# Altium PCB Rascal.PcbDoc (part 2 of 3)
Units mm, origin at the board's own origin, x right, y up, seen from the top; angles counter-clockwise.
Board outline 120.65 x 53.34 mm, 4 copper layers (Top Layer, Ground Plane, Power Plane, Bottom Layer); 125 components, 215 nets, 799 pads, 528 vias.
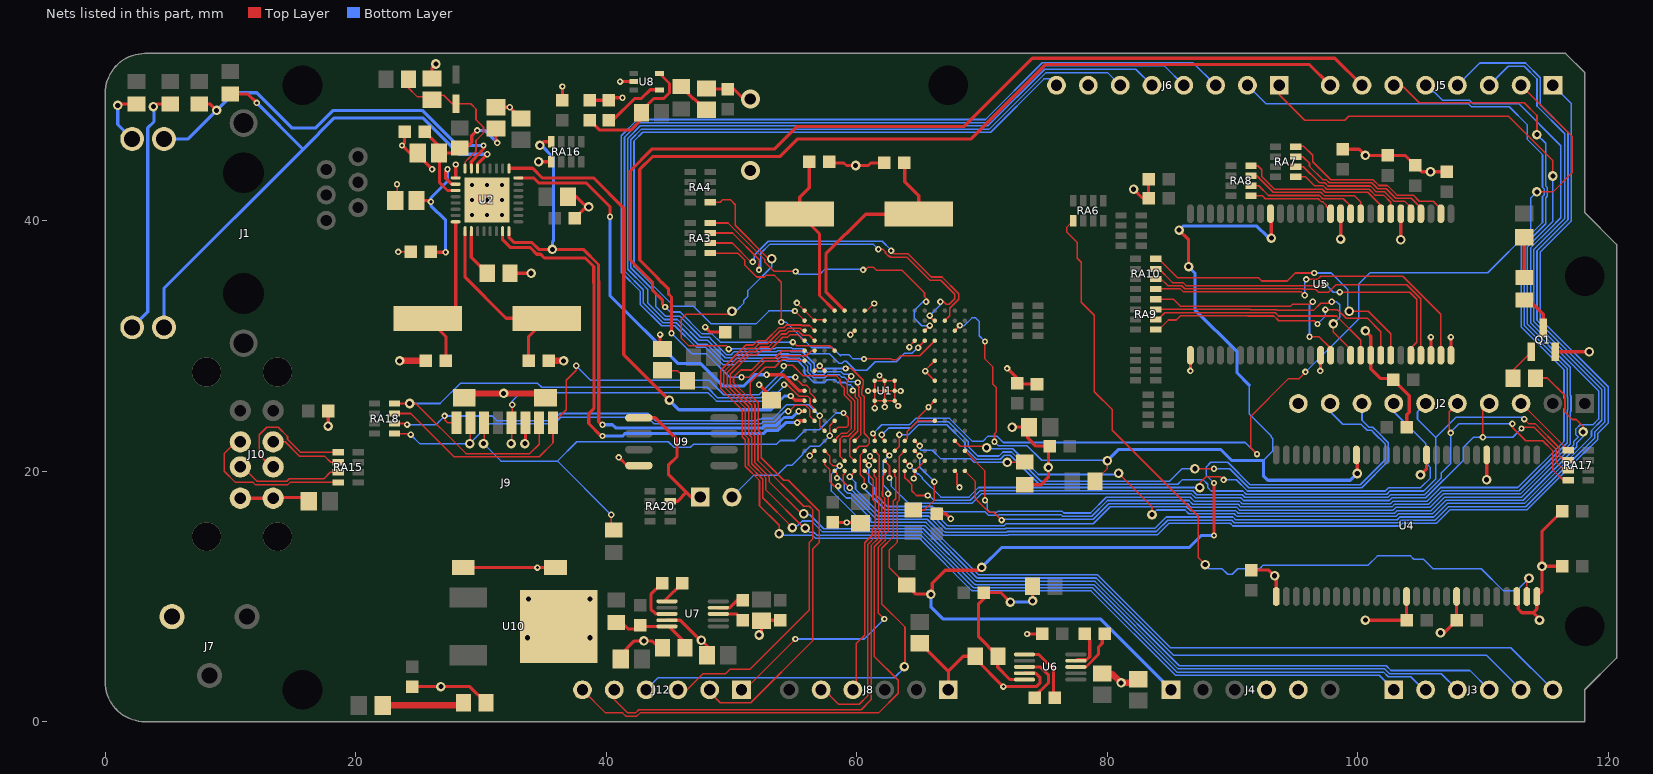
[diagram p4: the nets of this part, all layers, seen from the top]

## Via types
v1: diameter 0.508, hole 0.254, Top Layer to Bottom Layer, 343 vias
v2: diameter 0.762, hole 0.406, Top Layer to Bottom Layer, 170 vias
v3: diameter 0.66, hole 0.33, Top Layer to Bottom Layer, tented top, 9 vias
v4: diameter 2.3, hole 2.3, Top Layer to Bottom Layer, 4 vias
v5: diameter 1.524, hole 0.889, Top Layer to Bottom Layer, 2 vias

## Nets (pads, with @x,y where several pads share a name; then routed paths per layer and width w, separated by ;. In a path a pad name is that pad's centre, name@x,y a point inside that pad or via, vN(x,y) a via of type N, cw(c..) or ccw(c..) an arc to the next point about the centre after c; other vN are vias at no path point) (continued)
D15: RA6.5 U4.53 | length 62.4
  Top Layer w0.127: RA6.5@77.286,39.988 76.778,39.48 76.778,39.067 77.597,38.248 77.597,36.997 77.915,36.679 77.915,33.483 78.963,32.434 78.963,26.341 80.391,24.913 80.391,23.262 87.249,16.404 87.249,13.102 v2(87.821,12.53) ; U4.53@113.486,9.738 113.486,11.272 v2(113.665,11.451)
  Bottom Layer w0.127: v2(87.821,12.53) 88.138,12.213 89.16,12.213 89.605,11.769 89.973,11.769 90.418,12.213 92.163,12.213 92.45,12.5 100.831,12.5 101.56,13.229 104.202,13.229 104.456,12.975 105.239,12.975 106.001,12.213 109.855,12.213 111.633,10.435 112.649,10.435 v2(113.665,11.451)
D16: RA7.8 U5.2 | length 14.7
  Top Layer w0.127: RA7.8@95.05,45.92 95.685,45.92 96.393,45.212 96.393,44.704 97.829,43.268 101.217,43.268 101.686,42.799 102.362,42.799 103.124,42.037 104.413,42.037 104.9,41.55 106.024,41.55 106.628,40.946 U5.2@106.628,40.194
D17: RA7.7 U5.4 | length 12.7
  Top Layer w0.127: RA7.7@95.034,45.104 95.612,45.104 96.139,44.577 96.139,44.323 97.188,43.274 97.464,43.274 97.723,43.014 101.111,43.014 101.581,42.545 102.257,42.545 103.019,41.783 104.267,41.783 105.028,41.022 U5.4@105.028,40.194
D18: RA7.6 U5.5 | length 11.4
  Top Layer w0.127: RA7.6@95.034,44.304 95.65,44.304 96.934,43.02 97.359,43.02 97.618,42.76 101.006,42.76 101.476,42.291 102.152,42.291 102.914,41.529 103.759,41.529 104.228,41.06 U5.5@104.228,40.194
D19: RA7.5 U5.7 | length 9.7
  Top Layer w0.127: RA7.5@95.034,43.504 95.815,43.504 96.553,42.766 97.253,42.766 97.513,42.506 100.901,42.506 101.37,42.037 102.046,42.037 102.628,41.455 U5.7@102.628,40.194
D20: RA8.8 U5.8 | length 13
  Top Layer w0.127: RA8.8@91.478,44.38 92.018,44.38 92.329,44.069 92.329,43.529 93.346,42.512 97.148,42.512 97.408,42.252 100.796,42.252 101.828,41.22 U5.8@101.828,40.194
D21: RA8.7 U5.10 | length 10.9
  Top Layer w0.127: RA8.7@91.478,43.58 91.919,43.58 93.241,42.258 97.043,42.258 97.302,41.998 99.712,41.998 100.228,41.482 U5.10@100.228,40.194
D22: RA8.6 U5.11 | length 9.6
  Top Layer w0.127: RA8.6@91.478,42.78 92.094,42.78 92.87,42.004 96.938,42.004 97.197,41.744 98.84,41.744 99.428,41.157 U5.11@99.428,40.194
D23: RA8.5 U5.13 | length 7.5
  Top Layer w0.127: RA8.5@91.478,41.98 92.386,41.98 92.616,41.75 96.833,41.75 97.092,41.49 97.221,41.49 97.493,41.218 97.493,41.089 97.79,40.793 97.79,40.232 U5.13@97.828,40.194
D24: RA9.8 U5.42 | length 18.8
  Top Layer w0.127: RA9.8@83.858,33.712 85.287,33.712 85.838,33.161 91.506,33.161 91.52,33.147 94.615,33.147 94.79,33.322 96.187,33.322 v1(96.393,33.528) ; v1(96.139,30.734) 96.901,30.734 97.828,29.807 U5.42@97.828,28.894
  Bottom Layer w0.127: v1(96.139,30.734) 96.139,33.274 v1(96.393,33.528)
D25: RA9.7 U5.44 | length 20.4
  Top Layer w0.127: RA9.7@83.858,32.893 83.872,32.907 91.4,32.907 91.414,32.893 93.512,32.893 93.575,32.829 96.456,32.829 97.028,33.401 97.917,33.401 v1(97.917,33.528) ; v2(98.044,31.75) 98.044,31.115 99.441,29.718 99.441,28.907 U5.44@99.428,28.894
  Bottom Layer w0.127: v1(97.917,33.528) 98.298,33.528 98.552,33.274 98.552,32.258 v2(98.044,31.75)
D26: RA9.6 U5.45 | length 18.8
  Top Layer w0.127: RA9.6@84.074,32.152 84.575,32.653 91.295,32.653 91.309,32.639 93.407,32.639 93.661,32.385 98.298,32.385 100.228,30.455 U5.45@100.228,28.894
D27: RA9.5 U5.47 | length 22.4
  Top Layer w0.127: RA9.5@83.858,31.312 84.123,31.312 84.878,32.067 85.509,32.067 85.841,32.399 91.19,32.399 91.204,32.385 93.301,32.385 93.682,32.004 96.52,32.004 v1(96.774,31.75) ; v1(97.409,32.893) 98.379,32.893 99.077,32.194 100.766,32.194 101.828,31.132 U5.47@101.828,28.894
  Bottom Layer w0.127: v1(96.774,31.75) 97.409,32.385 v1(97.409,32.893)
D28: RA10.8 U5.48 | length 25.2
  Top Layer w0.127: RA10.8@83.858,36.944 84.087,36.944 85.598,35.433 92.075,35.433 92.329,35.179 94.361,35.179 94.996,35.814 v1(96.52,35.814) ; v2(99.314,32.766) 100.838,32.766 102.628,30.976 U5.48@102.628,28.894
  Bottom Layer w0.127: v1(96.52,35.814) 97.869,35.814 99.187,34.496 99.187,32.972 99.52,32.972 v2(99.314,32.766)
D29: RA10.7 U5.50 | length 26.8
  Top Layer w0.127: RA10.7@84.071,36.188 85.207,35.052 86.046,35.052 86.285,34.813 95.7,34.813 95.73,34.783 97.267,34.783 v1(97.409,34.925) ; v1(98.552,34.29) 104.14,34.29 104.7,33.73 104.7,30.28 104.228,29.808 U5.50@104.228,28.894
  Bottom Layer w0.127: v1(97.409,34.925) 98.044,34.29 v1(98.552,34.29)
D30: RA10.6 U5.51 | length 27.2
  Top Layer w0.127: RA10.6@83.858,35.344 84.29,35.344 84.836,34.798 85.941,34.798 86.18,34.559 95.594,34.559 95.625,34.529 96.625,34.529 96.864,34.29 97.663,34.29 98.25,34.877 103.912,34.877 105.028,33.761 U5.51@105.028,28.894
D31: RA10.5 U5.53 | length 29.2
  Top Layer w0.127: RA10.5@83.858,34.544 85.836,34.544 86.075,34.305 95.489,34.305 v1(95.758,34.036) ; v1(95.885,35.306) 96.774,35.306 97.028,35.56 103.588,35.56 106.628,32.52 U5.53@106.628,28.894
  Bottom Layer w0.127: v1(95.758,34.036) 95.758,35.179 v1(95.885,35.306)
DRXD: J8.4 U1.L17 | length 18.5
  Top Layer w0.127: J8.4@59.944,2.54 59.944,6.209 60.635,6.899 60.635,14.273 61.24,14.879 61.24,15.377 61.484,15.621 61.484,17.51 61.293,17.7 61.293,18.7 61.3,18.706 61.3,19.346 U1.L17@60.63,20.016
DTXD: J8.5 U1.K17 | length 22.9
  Top Layer w0.127: J8.5@57.277,2.667 58.544,1.4 60.2,1.4 60.889,2.088 60.889,14.167 61.494,14.773 61.494,15.272 61.738,15.516 61.738,17.615 61.547,17.805 61.547,18.595 61.554,18.601 61.554,19.451 61.392,19.613 61.392,19.978 U1.K17@61.43,20.016
ERX0: RA16.4 U1.U11 U2.16 | length 48.1
  Top Layer w0.254: U2.16@32.23,39.156 32.23,38.676 32.663,38.243 34.073,38.243 34.616,37.7 38.176,37.7 39.382,36.493 39.382,35.168 39.398,35.152 39.398,25.963 39.4,25.962 39.4,23.923 v1@39.661,23.661 ; v2(34.7,46) 35,46.3 RA16.4@35.6,46.3 ; v1@55.372,24.765 55.753,24.765 55.804,24.816 U1.U11@55.83,24.816
  Bottom Layer w0.254: v2@34.8,46 35.8,45 35.8,38.4 35.7,38.3 v2(35.7,37.7) ; v1(39.7,23.7) 40.5,23.7 40.747,23.453 52.474,23.453 52.652,23.631 53.539,23.631 54.186,24.278 54.864,24.278 v1(55.372,24.786)
ERX1: U1.U12 U2.15 | length 39.6
  Top Layer w0.254: U2.15@31.73,39.156 31.73,38.47 32.338,37.862 33.916,37.862 34.459,37.319 34.759,37.319 35.062,37.015 38.321,37.015 39.001,36.335 39.001,35.011 39.017,34.995 39.017,24.992 38.6,24.574 38.6,23.8 v1@39.65,22.75 ; v1@55.245,24.016 U1.U12@55.83,24.016
  Bottom Layer w0.254: v1(39.7,22.8) 41.3,22.8 41.508,23.008 52.568,23.008 52.81,23.25 53.697,23.25 54.323,23.876 v1(55.245,23.876)
ETX0: U1.U9 U2.24 | length 34.8
  Top Layer w0.254: U2.24@32.98,43.406 34.194,43.406 34.6,43 38.4,43 40.3,41.1 v1(40.3,40.3) ; v1(52.8,27.7) 54.118,27.7 55.402,26.416 U1.U9@55.83,26.416
  Bottom Layer w0.254: v1(40.3,40.3) 40.3,34 45.7,28.6 47.5,28.6 49.3,26.8 51,26.8 51.9,27.7 v1(52.8,27.7)
ETX1: U1.U10 U2.25 | length 39
  Top Layer w0.254: U2.25@32.23,44.156 32.255,44.181 34.119,44.181 34.9,43.4 39,43.4 41.4,41 41.4,29.3 v2(45.033,25.667) ; v1(54.73,26) 55.076,25.654 U1.U10@55.792,25.654
  Bottom Layer w0.254: v2(45.033,25.667) 45.8,24.9 53.126,24.9 54.226,26 v1(54.73,26)
GND: C3.2 C6.2 C7.2 C8.2 C9.2 C10.2 C11.2 C12.2 C13.1 C14.1 C15.2 C16.2 C17.2 C18.2 C19.2 C20.2 C21.2 C22.2 C23.2 C24.2 C25.2 C26.2 C27.2 C28.2 C29.2 C30.2 C31.2 C34.2 C36.2 C37.2 C40.2 C42.2 C43.2 C44.2 C46.2 C47.1 C48.1 C49.1 C50.1 C51.1 C52.1 C53.1 C54.1 C55.1 C56.1 C57.1 C58.1 C59.1 C60.1 C61.2 C62.2 C65.1 J2.10 J4.4 J4.5 J6.7 J7.2 J8.1 J9.6 J9.9 J9.10 J9.11 J9.12 J10.4 J10.8 Q1.2 R53.2 R62.2 R64.2 R68.1 R78.2 RA16.5 U1.B17 U1.D6 U1.D8 U1.D10 U1.D12 U1.E16 U1.F4 U1.F17 U1.G14 U1.H8 U1.H9 U1.H10 U1.J8 U1.J9 U1.J10 U1.K8 U1.K9 U1.K10 U1.K16 U1.L1 U1.M3 U1.R2 U1.R7 U1.T2 U1.T7 U1.T15 U1.U1 U2.1 U2.33 U4.6 U4.12 U4.28 U4.41 U4.46 U4.52 U4.54 U5.6 U5.12 U5.28 U5.41 U5.46 U5.52 U5.54 U6.9 U7.9 U8.2 U9.4 U10.2 | length 212.1
  Top Layer w0.127: C10.2@23.3,41.6 v1(23.3,42.9) ; v1(23.4,37.5) C11.2@24.4,37.5 ; C44.2@40.2,49.6 C44.2@40.4,49.8 ; v1@41.1,51.1 v1(41.106,51.094) ; v1@55.3,33.4 v1(55.216,33.43) U1.U1@55.83,32.816 U1.T2@56.63,32.016 56.714,32.1 57.346,32.1 U1.R2@57.43,32.016 ; v1@56.185,21.215 56.2,21.2 56.214,21.2 U1.T15@56.63,21.616 ; U1.T7@56.63,28.016 57,28.386 57,28.4 v1(57.046,28.4) U1.R7@57.43,28.016 ; v1@59.4,30.8 59.816,31.216 U1.M3@59.83,31.216 ; U1.L1@60.63,32.816 60.816,32.816 v1@61.4,33.4 ; v1(60.9,26.4) 60.916,26.416 U1.K9@61.43,26.416 ; v1(61.05,21.19) 61.056,21.19 U1.K16@61.43,20.816 ; U1.K8@61.4,27.2 U1.K8@61.43,27.2 ; v1(61.43,25.03) U1.K10@61.43,25.616 ; U1.K8@61.43,27.216 U1.K8@61.43,27.2 ; v1(61.816,27.63) U1.J8@62.23,27.216 U1.J8@62.23,27.2 ; v1@62.2,25.1 v1(62.23,25.13) U1.J10@62.23,25.616 ; v1(63.3,25.2) 63.03,25.47 U1.H10@63.03,25.616 ; v1(63.5,26.4) 63.484,26.416 U1.H9@63.03,26.416 ; U1.G14@63.83,22.416 64.042,22.628 64.042,23.168 ; 64.038,23.172 64.882,24.016 ; v1(64.2,29.9) 64.2,29.986 U1.F4@64.63,30.416 ; v1@64.6,19.3 64.63,19.33 U1.F17@64.63,20.016 U1.E16@65.43,20.816 ; U1.D12@66.23,24.016 64.882,24.016 ; U1.D10@66.23,25.616 64.882,24.268 64.882,24.016 ; U1.D8@66.23,27.216 65.546,27.9 65.4,27.9 65.4,27.986 U1.D6@66.23,28.816 ; U1.B17@67.83,20.016 68,19.846 68,18.9 v1(68.2,18.7) ; U1.K10@61.43,25.616 U1.J10@62.23,25.616 ; U1.K10@61.43,25.616 U1.K9@61.43,26.416 ; U1.K9@61.43,26.416 U1.J9@62.23,26.416 ; U1.K9@61.43,26.416 U1.K8@61.43,27.2 ; U1.K8@61.43,27.2 U1.J8@62.23,27.2 ; U1.J10@62.23,25.616 U1.J9@62.23,26.416 ; U1.J10@62.23,25.616 U1.H10@63.03,25.616 ; U1.J9@62.23,26.416 U1.H9@63.03,26.416 ; U1.J9@62.23,26.416 U1.J8@62.23,27.2 ; U1.J8@62.23,27.2 63.014,27.2 U1.H8@63.03,27.216 U1.H9@63.03,26.416 ; U1.H10@63.03,25.616 U1.H9@63.03,26.416
  Top Layer w0.254: J10.8@10.79,17.836 13.51,17.836 13.574,17.9 15.95,17.9 C14.1@16.25,17.6 ; v2@17.8,23.5 C13.1@17.8,24.8 ; C9.2@23.9,47.1 23.9,46.2 v1(23.7,46) 24.3,45.4 C8.2@24.95,45.4 ; C65.1@24.5,2.8 29.1,2.8 R78.2@30.4,1.5 ; C8.2@25.1,45.4 25,45.5 25,45.2 v1(26.1,44.1) ; C15.2@26.1,51.5 26.1,52.2 v2(26.4,52.5) ; U2.1@27.98,43.406 v1(27.98,44.48) ; J9.9@28.6,12.3 J9.10@35.95,12.3 ; C3.2@31.2,49.05 v1(32.3,49.05) C12.2@33.2,48.15 ; R53.2@32.3,35.8 v2(34,35.8) ; v2@33.5,22.3 33.55,22.35 J9.6@33.55,23.85 ; v2(34.6,44.7) RA16.5@35.6,44.7 ; C42.2@36.5,49.6 v1(36.5,50.7) ; C6.2@36.9,41.9 37.6,41.9 38.4,41.1 C7.2@37.5,40.2 C7.2@37.3,40.2 ; C43.2@38.7,49.6 C44.2@40.2,49.6 ; C44.2@40.4,49.8 v1(41.3,49.8) ; v1(41,21.1) 41.653,20.447 U9.4@42.6,20.447 ; v1(41.106,51.094) U8.2@42.197,51.094 ; C36.2@41.2,5.4 42.25,6.45 43.65,6.45 44.5,5.6 R64.2@44.5,5.5 ; v1(44.3,30.9) 44.3,29.95 C52.1@44.5,29.75 ; U7.9@44.85,8.1 45.9,8.1 v2@47.55,6.45 ; v2(47.6,6.5) 48.1,6 C37.2@48.1,5.3 ; v1(47.9,31.5) 48.3,31.1 C53.1@49.5,31.1 ; C55.1@48,50.5 49.3,50.5 50.2,50.5 v5@51,49.7 ; v1(52.2,26.9) 53.2,25.9 C56.1@53.2,25.6 ; v2@52.21,6.91 52.4,7.1 52.4,8.1 C46.2@53.9,8.1 ; C60.1@57.8,44.7 57.9,44.6 58.975,44.6 59.175,44.4 60.925,44.4 61.125,44.6 C59.1@62.2,44.6 ; C51.1@58.1,15.9 C50.1@60.3,15.9 ; C34.2@65.024,6.312 67.31,4.026 ; C49.1@66.4,16.6 67.1,16.6 v1(67.5,16.2) ; J8.1@67.31,2.54 67.31,4.026 ; v1(72,28.2) 72.8,27.4 C58.1@72.8,27 72.85,26.95 C57.1@74.388,26.95 ; v2@72.4,23.531 73.648,23.531 73.648,22.652 74.3,22 C47.1@75.4,22 75.3,21.9 75.3,19.5 74.712,18.912 R68.1@73.406,18.912 ; U6.9@73.388,3.864 74.274,3.864 74.638,3.5 74.638,3.1 74.338,2.8 v1(71.7,2.8) 69.458,5.042 R62.2@69.458,5.228 68.512,5.228 67.31,4.026 ; v1(73.6,7) C22.2@74.8,7 ; v2(82.1,42.5) 82.8,41.8 C27.2@83.3,41.8 C28.2@83.3,43.3 ; v1(86.628,28) U5.28@86.628,29.25 ; C20.2@91.5,12.1 92.9,12.1 93.486,11.514 U4.28@93.486,9.992 ; v1@97.028,28 U5.41@97.028,29.25 ; v2(98.628,38.528) U5.12@98.628,40.55 ; C26.2@98.8,45.7 100.1,45.7 v2(100.6,45.2) C25.2@102.4,45.2 103.8,45.2 C24.2@104.6,44.4 105.1,43.9 C23.2@106.9,43.9 ; v2(100.6,8.1) C19.2@103.9,8.1 ; v2(100.6,31.2) 101.028,30.772 U5.46@101.028,29.25 101.028,28.172 101.8,27.4 102.732,27.4 C29.2@102.832,27.3 104.1,26.032 104.1,24.7 103.9,24.5 C21.2@103.9,23.5 ; U5.6@103.428,40.55 v2(103.428,38.472) v2@103.5,38.4 ; C19.2@103.8,8.2 103.886,8.286 U4.41@103.886,9.992 ; v2(105,19.7) 105.486,20.186 U4.12@105.486,21.292 ; U5.52@105.828,29.25 v1(105.828,30.7) ; v2(106.6,7.1) 106.9,7.1 C18.2@107.9,8.1 107.886,8.114 U4.46@107.886,9.992 ; U5.54@107.428,29.25 v1(107.428,30.7) ; U4.6@110.286,21.292 v2(110.286,19.314) v2@110.3,19.3 ; U4.52@112.686,9.992 112.8,9.878 112.8,8.992 113.092,8.7 114,8.7 ; v2(114.5,8.1) 114.5,8.2 114,8.7 ; Q1.2@115.758,29.53 v2(118.47,29.53) ; C16.2@116.3,12.4 v2(114.7,12.4) ; C17.2@116.3,16.8 114.7,15.2 v2(114.7,12.4) ; 114,8.7 114.286,8.986 U4.54@114.286,9.992 114.7,10.406 v2(114.7,12.4)
  Top Layer w0.508: v2(23.5,28.8) C62.2@25.6,28.8 ; J9.11@28.65,26.2 J9.12@35.15,26.2 ; C61.2@35.4,28.8 v2(36.6,28.8) ; C31.2@79.5,3.8 80.4,3.8 v2(81.1,3.1) 82.236,3.1 C30.2@82.476,3.34
  other v1: 34.5,12.3 59.2,15.9 64.546,19.414 56.25,21.23 65.727,25.113 65.462,27.984 97,28 59.49,30.89 61.4,33.384
  other v2: 26.8,2.8 43,6.45 33.7,6.7 38.7,6.7 52.2,6.919 33.8,9.8 38.7,9.8 93.354,11.646 75.3,20.3 33.5,22.2 72.4,23.5 17.8,23.6 31.8,26.2 38.6,41.1 105.8,43.9 59.9,44.4
  other v3: 29.28,40.456 30.48,40.456 31.68,40.456 29.28,41.656 30.48,41.656 31.68,41.656 29.28,42.856 30.48,42.856 31.68,42.856
  other v4: 8.08,14.766 13.76,14.766 8.08,27.906 13.76,27.906
  other v5: 51.5,44 51.5,49.7
NetC3_1: C3.1 C8.1 C9.1 L1.2 U2.3 | length 13.4
  Top Layer w0.254: C9.1@25.5,47.1 26.7,45.9 C8.1@26.7,45.4 ; U2.3@27.98,42.406 27.336,42.406 27.33,42.4 26.7,43.03 C8.1@26.7,45.4 ; v1(29.7,47.2) 29.27,46.77 29.27,46.27 28.8,45.8 L1.2@28.3,45.8 27.9,45.4 C8.1@26.7,45.4 ; C3.1@31.2,47.35 31.2,46.3 v1(31.3,46.2)
  Bottom Layer w0.254: v1(29.7,47.2) 30.3,47.2 v1(31.3,46.2)
NetC10_1: C10.1 C11.1 U2.2 | length 11.8
  Top Layer w0.254: C10.1@24.85,41.6 25.9,41.6 v1(26,41.5) ; C11.1@26,37.5 26.025,37.475 v1(27.175,37.475) ; v1(27.33,44.1) 27.155,43.925 27.155,43.406 27.655,42.906 U2.2@27.98,42.906
  Bottom Layer w0.254: v1(27.175,37.475) 27.175,40.025 26,41.2 v1(26,41.5) 26,41.8 27.33,43.13 v1(27.33,44.1)
NetC15_1: C15.1 D1.1 R50.1 U2.32 | length 12.5
  Top Layer w0.127: R50.1@24.2,51.3 24.2,50.6 24.9,49.9 26,49.9 26.1,50 27.025,50 27.7,49.325 29.175,49.325 29.6,48.9 29.6,48.058 30.2,47.458 30.2,47 29.6,46.4 29.6,45.531 29.079,45.01 29.061,45.01 28.73,44.679 U2.32@28.73,44.156
NetC32_1: C32.1 U6.8 | length 4.4
  Top Layer w0.254: U6.8@73.388,4.364 74.651,4.364 75.311,3.704 75.311,3.122 C32.1@74.13,1.941
NetC32_2: C32.2 U6.6 | length 5.1
  Top Layer w0.254: U6.6@73.388,5.364 74.54,5.364 75.692,4.212 C32.2@75.692,1.9
NetC33_1: C33.1 U6.3 | length 4.1
  Top Layer w0.254: U6.3@77.488,4.364 78.298,4.364 79.3,5.366 79.3,5.95 79.6,6.25 C33.1@79.6,7.1
NetC33_2: C33.2 U6.4 | length 3.4
  Top Layer w0.254: U6.4@77.488,4.864 77.584,4.96 78.355,4.96 78.592,5.197 78.592,6.508 C33.2@78,7.1
NetC35_2: C35.2 R61.2 R62.1 U6.10 | length 14.8
  Top Layer w0.254: C35.2@70.142,10.308 71.501,10.308 v2(72.263,9.546) ; C35.2@70.485,10.181 69.723,9.419 69.723,6.763 R62.1@71.258,5.228 71.258,4.328 72.222,3.364 U6.10@73.388,3.364 ; R61.2@74.03,10.816 v2(74.03,9.648) 74.03,9.557 v2@74.041,9.546
  Bottom Layer w0.254: v2(72.263,9.546) 74.019,9.546 v2@74.03,9.557
NetC38_1: C38.1 U7.8 | length 3.9
  Top Layer w0.254: C38.1@44.467,11.059 43.567,10.159 43.567,8.983 43.95,8.6 U7.8@44.85,8.6
NetC38_2: C38.2 U7.6 | length 1.9
  Top Layer w0.254: U7.6@44.729,9.721 C38.2@46.067,11.059
NetC39_1: C39.1 U7.3 | length 2.2
  Top Layer w0.254: U7.3@48.95,8.6 50.4,8.6 C39.1@50.9,8.1
NetC39_2: C39.2 U7.4 | length 2.2
  Top Layer w0.254: U7.4@48.95,9.1 49.85,9.1 50.45,9.7 C39.2@50.9,9.7
NetC41_2: C41.2 R63.2 R64.1 U7.10 | length 7.1
  Top Layer w0.254: R63.2@40.8,7.9 41.25,7.9 41.75,7.4 42.6,7.4 C41.2@42.8,7.6 ; C41.2@42.7,7.7 C41.2@42.8,7.6 ; U7.10@44.85,7.6 C41.2@42.8,7.6 ; U7.10@45.025,7.575 46.3,6.3 R64.1@46.3,5.5
NetC43_1: C43.1 L5.1 U8.5 | length 10.2
  Top Layer w0.254: C43.1@38.7,48 39.478,47.222 41.947,47.222 42.8,48.075 L5.1@42.8,48.6 42.8,48.744 43.8,49.744 44.591,49.744 45.046,50.199 45.046,50.945 U8.5@44.247,51.744
NetC44_1: C44.1 U8.4 | length 5.1
  Top Layer w0.254: C44.1@40.2,48 40.526,48 42.27,49.744 42.8,49.744 43.5,50.444 U8.4@44.247,50.444
NetC52_2: C52.2 R66.2 | length 2.3
  Top Layer w0.127: C52.2@44.5,28 45.7,28 R66.2@46.5,27.2
NetC55_2: C55.2 R67.2 | length 2.6
  Top Layer w0.254: R67.2@46,50.7 47,49.7 47.05,49.7 47.8,48.95 C55.2@47.8,48.9
NetC59_2: C59.2 U1.N1 Y2.2 | length 18.5
  Top Layer w0.254: U1.N1@59.03,32.816 57.531,34.315 57.531,37.338 60.706,40.513 Y2.2@64.948,40.513 64.948,41.986 63.828,43.106 C59.2@63.828,44.7
NetC60_2: C60.2 U1.P1 Y2.1 | length 13.4
  Top Layer w0.254: C60.2@56.208,44.7 56.208,42.619 55.448,41.859 Y2.1@55.448,40.513 57.023,38.938 57.023,34.023 U1.P1@58.23,32.816
NetC61_1: C61.1 U2.9 Y1.2 | length 16.9
  Top Layer w0.254: U2.9@28.73,39.156 28.73,35.47 32,32.2 Y1.2@35.25,32.2 ; C61.1@33.8,28.8 33.8,30.75 Y1.2@35.25,32.2 ; Y1.2@36.55,32.2 Y1.2@35.25,32.2
NetC62_1: C62.1 U2.8 Y1.1 | length 12.1
  Top Layer w0.254: Y1.1@25.75,32.2 27.2,30.75 C62.1@27.2,28.8 ; Y1.1@27.05,32.2 27.98,33.13 U2.8@27.98,39.906
NetD2_2: D2.2 R78.1 | length 6.5
  Top Layer w0.508: D2.2@22.15,1.3 28.4,1.3 R78.1@28.6,1.5
NetD4_2: D4.2 R87.1 | length 3.2
  Top Layer w0.254: R87.1@113.284,35.444 D4.2@113.284,38.674
NetJ1_13: J1.13 R46.1 U2.30 | length 44.8
  Top Layer w0.254: R46.1@10,50.1 11.4,50.1 v1(12.1,49.4) ; U2.30@29.73,44.156 29.73,44.53 v1(30.5,45.3)
  Bottom Layer w0.254: J1.13@4.695,31.482 4.695,34.595 15.806,45.706 18.3,48.2 25.35,48.2 28.25,45.3 v1(30.5,45.3) ; v1(12.1,49.4) 15.794,45.706
NetJ1_14: J1.14 R43.1 | length 19.7
  Top Layer w0.254: v2@3.9,49.1 4.1,49.3 R43.1@5.2,49.3
  Bottom Layer w0.254: J1.14@2.155,31.482 3.4,32.727 3.4,47.4 3.9,47.9 v2@3.9,49.1
  other v2: 3.85,49.1
NetJ1_15: J1.15 R45.1 U2.31 | length 33.9
  Top Layer w0.254: J1.15@4.695,46.518 J1.15@4.813,46.4 ; R45.1@7.5,49.3 8.4,49.3 v2(8.9,48.8) ; U2.31@29.23,44.156 29.23,44.712 29.992,45.474 29.992,45.51 30.2,45.718 v1(30.2,46)
  Bottom Layer w0.254: J1.15@4.695,46.518 6.618,46.518 v2(8.9,48.8) 10.3,50.2 12.1,50.2 14.9,47.4 16.81,47.4 18.21,48.8 25.3,48.8 28.1,46 v1(30.2,46)
NetJ1_16: J1.16 R42.1 | length 4.7
  Top Layer w0.254: v2(1,49.2) 1.1,49.3 R42.1@2.5,49.3
  Bottom Layer w0.254: v2(1,49.2) 1,47.673 J1.16@2.155,46.518
NetJ2_3: J2.3 RA17.5 | length 6.1
  Top Layer w0.127: J2.3@112.38,25.4 113.06,25.4 116.611,21.849 RA17.5@116.983,21.849
NetJ2_5: J2.4 RA17.7 U1.J16 | length 65.2
  Top Layer w0.127: U1.J16@62.23,20.816 62.611,20.435 v1(62.611,19.452) v1@62.738,19.325 ; J2.4@109.84,25.4 109.985,25.255 v1(109.985,22.7) ; v1@113.157,23.516 114.046,23.516 115.824,21.738 115.824,20.722 116.459,20.087 116.783,20.087 RA17.7@116.802,20.068
  Top Layer w0.254: U1.J16@62.23,20.816 U1.J16@62.23,20.828
  Bottom Layer w0.127: v1(62.611,19.452) 62.738,19.325 62.738,18.817 64.123,17.432 66.158,17.432 66.17,17.42 69.171,17.42 69.933,18.182 86.717,18.182 87.034,17.865 90.66,17.865 90.871,17.653 102.508,17.653 102.719,17.865 105.43,17.865 108.418,20.853 108.418,21.882 109.236,22.7 112.36,22.7 v1(113.06,23.4)
NetJ2_7: J2.5 RA17.8 U1.G17 | length 64.7
  Top Layer w0.127: U1.G17@63.83,20.016 63.83,19.482 64.05,19.262 ; 64.065,19.262 64.325,19.001 ; 64.325,18.986 64.389,18.923 64.389,18.436 64.77,18.055 v1(65.659,18.055) ; v1(107.41,23.05) 107.3,23.16 107.3,24.75 J2.5@107.95,25.4 ; v1(112.335,23.775) 112.335,23.496 113.406,22.425 114.756,22.425 115.57,21.611 115.57,20.087 116.389,19.268 RA17.8@116.802,19.268
  Bottom Layer w0.127: v1@65.786,18.055 66.155,17.686 66.263,17.686 66.275,17.674 69.065,17.674 69.827,18.436 86.822,18.436 87.139,18.119 90.765,18.119 90.977,17.907 102.403,17.907 102.614,18.119 105.325,18.119 106.672,19.466 106.672,19.869 107.418,20.615 107.418,23.124 108.069,23.775 v1(112.335,23.775)
NetJ2_9: J2.6 RA17.6 U1.H15 | length 68.3
  Top Layer w0.127: U1.H15@63.03,21.626 U1.H15@63.03,21.616 63.403,21.989 v1(63.403,22.9) ; v1(113.284,24.151) 113.665,23.77 114.173,23.77 116.078,21.865 116.078,21.23 116.44,20.868 RA17.6@116.802,20.868
  Bottom Layer w0.127: v1@63.383,22.9 64.125,22.9 64.925,23.7 67.192,23.7 68.64,22.252 68.64,21.865 69.55,20.955 71.455,20.955 71.772,21.273 72.246,21.273 74.574,18.944 85.619,18.944 86,19.325 87.63,19.325 88.011,18.944 88.011,18.69 88.286,18.415 90.828,18.415 91.082,18.161 102.297,18.161 102.551,18.415 105.262,18.415 106.224,19.377 106.224,22.687 ; J2.6@105.41,25.4 104.76,24.75 104.76,24.151 106.224,22.687 ; v1(113.284,24.151) 113.135,24.3 107.838,24.3 106.224,22.687
NetJ2_11: J2.7 U1.G16 | length 52.2
  Top Layer w0.127: U1.G16@63.83,20.816 v1(64.23,20.416) ; v2(87.376,18.69) 87.376,19.05 87.884,19.558 89.027,19.558 v1(89.281,19.304)
  Bottom Layer w0.127: v1(64.23,20.416) 64.876,19.77 64.954,19.77 65.215,19.509 65.215,19.432 66.718,17.928 68.96,17.928 69.722,18.69 86.927,18.69 86.943,18.674 87.244,18.674 v2@87.376,18.542 ; v1(89.281,19.304) 90.298,19.304 91.187,18.415 102.192,18.415 102.446,18.669 105.008,18.669 105.791,19.452 105.791,20.29 105.418,20.663 105.418,22.202 102.87,24.75 J2.7@102.87,25.4
NetJ2_13: J2.8 U1.J14 | length 51.5
  Top Layer w0.127: v1(62,22.9) 62,22.646 U1.J14@62.23,22.416 ; v2(86.995,20.193) v1(88.519,20.193)
  Bottom Layer w0.127: v1(62,22.9) 62.544,23.444 64.31,23.444 64.82,23.954 67.297,23.954 68.894,22.357 68.894,21.97 69.655,21.209 71.35,21.209 71.667,21.526 72.351,21.526 74.679,19.198 84.963,19.198 85.958,20.193 v2(86.995,20.193) ; v1(88.519,20.193) 89.768,20.193 91.292,18.669 100.304,18.669 102.435,20.8 102.435,22.272 101.609,23.098 101.199,23.507 100.893,23.507 100.33,24.07 J2.8@100.33,25.4
NetJ2_15: J2.9 J4.1 R76.2 U1.G15 | length 91.2
  Top Layer w0.127: U1.G15@63.83,21.616 63.405,21.191 63.405,17.696 63.246,17.537 63.246,14.346 62.6,13.7 62.6,12.3 R76.2@64,10.9
  Top Layer w0.254: R76.2@64,10.9 64.719,10.181 v2@65.934,10.181 ; v2@66.019,10.16 66.019,11.049 67.056,12.086 v2@69.871,12.086 ; v2@69.744,12.086 v2(69.977,12.319) ; v1(88.519,14.859) v1(88.519,19.05)
  Bottom Layer w0.127: v1(88.519,19.05) 87.884,19.685 87.884,20.32 88.265,20.701 89.62,20.701 91.398,18.923 100.199,18.923 102.181,20.905 102.181,22.167 101.355,22.993 101.094,23.253 100.747,23.253 100.25,23.75 98.79,23.75 97.79,24.75 J2.9@97.79,25.4
  Bottom Layer w0.254: v2(65.913,10.16) 65.913,9.159 66.872,8.2 79.43,8.2 J4.1@85.09,2.54 ; v2(69.977,12.319) 71.558,13.9 86.544,13.9 87.503,14.859 v1(88.519,14.859)
NetJ3_0: J3.1 U1.T3 | length 78.2
  Top Layer w0.127: v2@53.963,15.201 53.8,15.363 53.8,15.669 52.237,17.232 52.237,19.246 51.1,20.382 51.1,22.496 50.858,22.737 50.858,24.886 49.14,26.605 49.14,28.057 51.128,30.046 51.169,30.046 51.195,30.072 51.735,30.072 52.079,30.416 52.738,30.416 53.784,31.462 53.791,31.455 54.159,31.455 54.366,31.662 55.582,31.662 55.621,31.623 56.223,31.623 U1.T3@56.63,31.216
  Bottom Layer w0.127: v2@53.8,14.865 56.47,14.865 56.697,14.638 65,14.638 69.164,10.474 69.218,10.474 69.257,10.435 78.704,10.435 85.435,3.704 101.706,3.704 J3.1@102.87,2.54
  other v2: 53.8,15
NetJ3_1: J3.2 U1.T4 | length 78.6
  Top Layer w0.127: v2@55.88,15.367 52.745,18.502 52.745,19.456 51.608,20.593 51.608,22.706 51.366,22.948 51.366,25.145 49.648,26.864 49.648,27.847 51.338,29.538 51.379,29.538 51.405,29.564 51.774,29.564 51.8,29.538 51.919,29.538 52.141,29.759 52.29,29.908 52.949,29.908 53.988,30.947 54.37,30.947 54.576,31.154 55.371,31.154 55.677,30.848 56.198,30.848 U1.T4@56.63,30.416
  Bottom Layer w0.127: v2(55.888,15.451) 56.22,15.119 56.575,15.119 56.802,14.892 65.106,14.892 69.27,10.728 69.323,10.728 69.362,10.689 78.809,10.689 85.54,3.958 102.046,3.958 102.427,3.577 104.227,3.577 105.264,2.54 J3.2@105.41,2.54
NetJ3_2: J3.3 U1.U3 | length 81.6
  Top Layer w0.127: v2(54.864,15.494) 52.491,17.867 52.491,19.351 51.354,20.487 51.354,22.601 51.112,22.842 51.112,25.039 49.394,26.758 49.394,27.952 51.233,29.792 51.274,29.792 51.3,29.818 51.84,29.818 51.887,29.864 52.185,30.162 52.844,30.162 53.883,31.201 54.264,31.201 54.471,31.408 55.476,31.408 55.668,31.216 U1.U3@55.83,31.216
  Bottom Layer w0.127: v2(54.864,15.494) 55.012,15.642 55.271,15.642 55.651,16.022 56.379,16.022 57.255,15.146 65.211,15.146 69.375,10.982 69.428,10.982 69.467,10.943 78.914,10.943 85.645,4.212 102.152,4.212 102.533,3.831 106.659,3.831 J3.3@107.95,2.54
NetJ3_3: J3.4 U1.U4 | length 81.8
  Top Layer w0.127: v2(55.763,16.601) 55.763,16.52 55.753,16.51 55.669,16.51 52.999,19.18 52.999,19.561 51.862,20.698 51.862,22.811 51.62,23.053 51.62,25.25 49.902,26.969 49.902,27.741 51.444,29.284 51.484,29.284 51.511,29.31 51.668,29.31 51.695,29.284 52.025,29.284 52.173,29.432 52.395,29.654 53.054,29.654 54.093,30.693 54.475,30.693 54.681,30.9 55.266,30.9 55.75,30.416 U1.U4@55.83,30.416
  Bottom Layer w0.127: v2(55.763,16.601) 55.854,16.51 56.25,16.51 57.36,15.4 65.316,15.4 69.48,11.236 69.533,11.236 69.572,11.197 79.02,11.197 85.751,4.466 102.257,4.466 102.638,4.085 108.945,4.085 J3.4@110.49,2.54
NetJ3_4: J3.5 U1.R15 | length 66.1
  Top Layer w0.127: U1.R15@57.43,21.616 57.434,21.616 57.828,21.223 57.828,20.687 58.094,20.42 v1(58.63,20.42)
  Bottom Layer w0.127: v1(58.63,20.42) 57.975,19.766 57.975,18.406 60.727,15.654 65.421,15.654 69.585,11.49 69.639,11.49 69.66,11.469 79.107,11.469 85.276,5.3 110.27,5.3 J3.5@113.03,2.54 J3.5@112.819,2.54
NetJ3_5: J3.6 U1.R16 | length 67.3
  Top Layer w0.127: U1.R16@57.43,20.816 57.43,20.537 57.835,20.132 57.835,19.175 58.21,18.8 v1(58.51,18.8)
  Bottom Layer w0.127: v1(58.51,18.8) 58.51,18.5 59.158,17.852 59.493,17.852 61.102,16.243 61.102,15.908 65.527,15.908 69.691,11.744 79.191,11.744 85.035,5.9 112.21,5.9 J3.6@115.57,2.54 J3.6@115.57,3.069
NetJ5_0: J5.1 U1.P17 | length 99.5
  Top Layer w0.127: U1.P17@58.23,20.016 58.42,19.826 v1(58.42,19.452)
  Bottom Layer w0.127: v1(58.42,19.452) 58.633,19.452 59.002,19.083 59.002,18.87 58.99,18.859 58.99,18.491 59.251,18.23 59.497,18.23 61.566,16.162 65.632,16.162 66.9,14.893 66.962,14.893 66.975,14.88 72.064,14.88 72.107,14.923 84.011,14.923 84.921,15.833 89.818,15.833 90.03,15.621 103.35,15.621 103.561,15.833 106.272,15.833 107.351,16.912 113.512,16.912 118.023,21.423 118.045,21.423 119.162,22.541 119.162,23.025 119.979,23.842 119.979,26.727 114.554,32.152 114.554,37.486 117.03,39.963 117.03,49.34 J5.1@115.57,50.8
NetJ5_1: J5.2 U1.K14 | length 82
  Top Layer w0.127: v1(61.3,23) 61.43,22.87 U1.K14@61.43,22.416 ; v1(91.948,21.357) 91.44,21.865 91.44,24.36 94.469,27.39 95.313,27.39 v1@95.829,27.906 ; J5.2@113.03,50.8 117.094,46.736 117.094,43.815 115.57,42.291 v2(114.3,42.291)
  Bottom Layer w0.127: v1(61.3,23) 62,23.7 64.207,23.7 64.715,24.208 67.402,24.208 69.237,22.373 70.058,22.373 70.481,22.796 71.177,22.796 71.685,22.288 91.017,22.288 v1(91.948,21.357) ; v1@95.829,27.906 100.076,32.152 100.076,34.946 100.965,35.835 110.378,35.835 113.792,39.249 113.792,41.783 v2(114.3,42.291)
  other v1: 95.81,27.925
NetJ5_2: J5.3 U1.M17 | length 103.1
  Top Layer w0.127: v1(59.436,19.558) 59.83,19.952 U1.M17@59.83,20.016
  Bottom Layer w0.127: v1(59.436,19.558) 59.9,19.094 59.9,18.546 61.776,16.67 65.842,16.67 67.111,15.401 67.172,15.401 67.186,15.388 71.854,15.388 71.897,15.431 83.801,15.431 84.71,16.341 90.029,16.341 90.24,16.129 103.139,16.129 103.351,16.341 106.061,16.341 107.141,17.42 113.301,17.42 118.654,22.773 118.654,23.235 119.471,24.052 119.471,26.516 114.046,31.942 114.046,37.696 116.522,40.173 116.522,46.926 114.3,49.149 114.3,51.308 113.284,52.324 112.014,52.324 J5.3@110.49,50.8
NetJ5_3: J5.4 U1.N17 | length 106.9
  Top Layer w0.127: U1.N17@59.03,20.016 59.03,19.808 58.928,19.706 58.928,19.159 v1@59.423,18.663
  Bottom Layer w0.127: v1@59.423,18.663 61.671,16.416 65.737,16.416 67.005,15.147 67.067,15.147 67.08,15.134 71.959,15.134 72.002,15.177 83.906,15.177 84.815,16.087 89.923,16.087 90.135,15.875 103.244,15.875 103.456,16.087 106.166,16.087 107.246,17.166 113.406,17.166 117.918,21.677 ; J5.4@107.95,50.8 109.728,52.578 113.389,52.578 114.554,51.413 114.554,49.254 116.776,47.032 116.776,40.068 114.3,37.591 114.3,32.047 119.725,26.622 119.725,23.947 118.908,23.13 118.908,22.646 117.939,21.677
  other v1: 59.435,18.675
NetJ5_4: J5.5 U1.L15 | length 106.1
  Top Layer w0.127: v1(60.6,18.8) 60.6,19.41 60.261,19.748 60.261,21.248 U1.L15@60.63,21.616
  Bottom Layer w0.127: v1(60.6,18.8) 60.6,18.6 62.276,16.924 65.947,16.924 67.216,15.655 67.277,15.655 67.291,15.642 71.749,15.642 71.907,15.8 78.879,15.8 80.229,17.15 86.312,17.15 86.613,16.849 90.239,16.849 90.451,16.637 102.929,16.637 103.14,16.849 105.851,16.849 106.93,17.928 113.091,17.928 117.221,22.058 117.221,22.351 117.59,22.72 117.411,22.898 117.411,23.372 117.746,23.707 118.767,23.707 119.217,24.157 119.217,26.411 113.792,31.836 113.792,37.811 115.376,39.395 115.376,39.397 116.205,40.226 116.205,45.995 ; J5.5@105.41,50.8 105.41,50.292 106.087,50.292 106.786,49.593 108.924,49.593 109.178,49.34 112.84,49.34 116.194,45.985
NetJ5_5: J5.6 U1.L16 | length 103
  Top Layer w0.127: U1.L16@60.63,20.816 60.63,20.798 60.96,20.468 v1(60.964,20.472) ; J5.6@102.87,50.8 103.505,50.8 104.902,49.403 113.284,49.403 114.3,48.387 v2(114.3,46.863)
  Bottom Layer w0.127: v1(60.964,20.472) 60.96,20.468 60.96,19.14 61.45,18.65 61.45,18.164 62.436,17.178 66.053,17.178 66.192,17.039 66.676,17.039 66.951,16.764 70.228,16.764 70.524,16.468 71.282,16.468 71.346,16.531 76.303,16.531 76.43,16.404 78.764,16.404 80.018,17.658 86.522,17.658 86.824,17.357 90.45,17.357 90.661,17.145 102.718,17.145 102.93,17.357 105.64,17.357 106.72,18.436 112.88,18.436 116.713,22.269 116.713,24.854 116.765,24.905 116.765,25.895 116.713,25.946 116.713,28.197 113.284,31.626 113.284,38.023 114.998,39.737 114.998,41.822 115.126,41.949 115.126,42.633 114.998,42.76 114.998,46.164 v2(114.3,46.863)
NetJ5_6: J5.7 U1.P5 | length 90
  Top Layer w0.127: v1(54.9,30.3) 55.2,30 57.846,30 U1.P5@58.23,29.616
  Top Layer w0.254: v1(44.7,33.1) 44.5,33.3 44.5,33.626 43.688,34.438 43.688,35.073 41.91,36.851 41.91,43.963 43.667,45.72 53.446,45.72 55.245,47.519 68.58,47.519 74.02,52.959 98.171,52.959 J5.7@100.33,50.8
  Bottom Layer w0.127: v1(44.7,33.1) 45.1,32.7 45.9,32.7 47.648,30.952 48.448,30.952 49.1,30.3 v1(54.9,30.3)
NetJ5_7: J5.8 U1.T5 | length 87.2
  Top Layer w0.127: v1(50.8,27.5) 51.4,27.5 52.666,28.765 53.554,28.765 53.988,29.2 55.96,29.2 56.376,29.616 U1.T5@56.63,29.616
  Top Layer w0.254: v1(45.212,31.009) 45.212,33.9 44.958,34.154 44.958,34.565 44.471,35.052 44.441,35.052 44.069,35.424 44.069,35.454 42.672,36.851 42.672,44.09 43.688,45.106 53.848,45.106 55.245,46.503 69.088,46.503 75.036,52.451 96.139,52.451 J5.8@97.79,50.8
  Bottom Layer w0.127: v1(45.212,31.009) 46.863,29.358 48.006,29.358 49.864,27.5 v1(50.8,27.5)
NetJ6_8: J6.1 U1.A17 | length 103.7
  Top Layer w0.127: U1.A17@68.63,20.016 69.469,19.177 69.469,17.801 70.549,16.722 70.929,16.722 v1(71.564,16.087) ; J6.1@93.726,50.8 93.726,50.038 95.754,48.01 98.96,48.01 99.273,48.323 112.031,48.323 115.57,44.785 v2(115.57,43.561)
  Bottom Layer w0.127: v1@71.498,16.15 78.87,16.15 80.123,17.404 86.417,17.404 86.718,17.103 90.344,17.103 90.556,16.891 102.823,16.891 103.035,17.103 105.746,17.103 106.825,18.182 112.986,18.182 116.967,22.163 116.967,24.749 117.019,24.8 117.019,26 116.967,26.052 116.967,28.302 113.538,31.731 113.538,37.918 115.57,39.95 v2(115.57,43.561)
NetJ6_9: J6.2 U1.A15 | length 106.1
  Top Layer w0.127: U1.A15@68.63,21.616 70.231,20.015 v1(70.231,17.674)
  Bottom Layer w0.127: v1(70.231,17.674) 70.421,17.484 70.421,16.929 70.629,16.722 71.177,16.722 71.241,16.785 76.408,16.785 76.535,16.658 78.659,16.658 79.913,17.912 86.628,17.912 86.929,17.611 90.555,17.611 90.766,17.399 102.613,17.399 102.825,17.611 105.535,17.611 106.615,18.69 112.775,18.69 116.459,22.374 116.459,24.959 116.511,25.01 116.511,25.79 116.459,25.841 116.459,28.092 113.03,31.521 113.03,38.128 114.745,39.843 114.745,41.927 114.871,42.054 114.871,42.528 114.745,42.655 114.745,45.272 113.538,46.479 113.538,47.625 112.078,49.085 109.072,49.085 108.818,49.34 92.647,49.34 J6.2@91.186,50.8
NetJ6_10: J6.3 U1.M16 | length 91.7
  Top Layer w0.127: v1(59.69,26.437) 59.69,26.444 59.75,26.504 59.892,26.362 59.892,25.904 59.944,25.852 60.078,25.718 60.078,23.184 59.436,22.543 59.436,21.21 U1.M16@59.83,20.816
  Bottom Layer w0.127: v1@59.686,26.441 59.686,26.695 59.499,26.882 59.274,26.882 59.083,27.072 58.454,27.072 58.226,27.3 57.652,27.3 57.424,27.072 56.566,27.072 55.816,27.821 55.816,28.279 55.33,28.765 54.434,28.765 54.358,28.842 53.989,28.842 53.913,28.765 50.517,28.765 50.257,28.506 49.311,28.506 47.94,29.877 47.196,29.877 45.473,31.6 44.422,31.6 42.699,33.323 42.699,34.374 41.2,35.873 41.2,46.768 42.501,48.069 70.273,48.069 74.803,52.599 86.847,52.599 J6.3@88.646,50.8
NetJ6_11: J6.4 U1.M14 | length 87.1
  Top Layer w0.127: U1.M14@59.83,22.416 60.332,22.918 60.332,25.824 60.198,25.957 60.146,26.009 60.146,26.611 60.198,26.663 60.198,26.691 59.944,26.945 v1(60.071,27.072)
  Bottom Layer w0.127: v1(60.071,27.072) 60.008,27.136 59.379,27.136 59.023,27.491 58.816,27.491 58.626,27.682 57.675,27.682 57.441,27.447 56.549,27.447 56.07,27.926 56.07,28.384 55.435,29.019 54.539,29.019 54.463,29.096 53.884,29.096 53.808,29.019 50.411,29.019 50.152,28.76 49.416,28.76 48.045,30.131 47.301,30.131 45.578,31.854 44.528,31.854 42.953,33.429 42.953,34.479 41.454,35.978 41.454,46.663 42.607,47.816 70.379,47.816 74.908,52.345 84.561,52.345 J6.4@86.106,50.8
NetJ6_12: J6.5 U1.N16 | length 85.9
  Top Layer w0.127: U1.N16@59.03,20.816 58.662,21.184 58.662,22.569 58.877,22.784 59.318,22.784 59.824,23.29 59.824,25.613 59.69,25.747 ; v1(59.563,27.58) 59.245,27.263 59.245,26.191 59.69,25.747
  Bottom Layer w0.127: v1(59.563,27.58) 59.398,27.745 58.922,27.745 58.731,27.936 57.569,27.936 57.335,27.701 56.655,27.701 56.325,28.032 56.325,28.489 55.54,29.273 54.645,29.273 54.568,29.35 53.779,29.35 53.702,29.273 50.306,29.273 50.073,29.041 49.495,29.041 48.091,30.444 47.384,30.444 45.965,31.863 45.928,31.863 45.683,32.108 44.633,32.108 43.3,33.441 43.3,34.514 43.127,34.687 43.127,34.701 41.708,36.12 41.708,46.558 42.712,47.561 70.484,47.561 75.013,52.091 82.275,52.091 J6.5@83.566,50.8
NetJ6_13: J6.6 U1.M15 | length 82.4
  Top Layer w0.127: v1@59.055,28.215 59.563,28.215 60.515,27.263 60.515,26.888 60.456,26.828 60.456,26.561 60.4,26.506 60.4,26.114 60.586,25.929 60.586,23.014 61.008,22.592 61.008,22.198 60.801,21.992 60.206,21.992 U1.M15@59.83,21.616
  Bottom Layer w0.127: v1(59.106,28.19) 57.464,28.19 57.23,27.955 56.862,27.955 56.599,28.218 56.599,28.573 55.645,29.527 54.75,29.527 54.673,29.604 53.674,29.604 53.597,29.527 50.201,29.527 49.968,29.295 49.6,29.295 48.345,30.549 48.345,30.586 48.234,30.698 47.543,30.698 45.879,32.362 44.738,32.362 43.95,33.15 43.95,34.238 41.962,36.226 41.962,46.452 42.817,47.307 70.589,47.307 75.098,51.816 80.01,51.816 J6.6@81.026,50.8
NetJ6_15: J6.8 U1.U2 | length 62.3
  Top Layer w0.127: v1(55.059,32.787) U1.U2@55.83,32.016
  Bottom Layer w0.127: v1(55.059,32.787) 52.992,32.787 51.955,31.75 48.387,31.75 46.99,33.147 45.4,33.147 42.216,36.331 42.216,46.347 42.922,47.053 70.694,47.053 74.949,51.308 75.438,51.308 J6.8@75.946,50.8
NetJ9_1: J9.1 RA18.6 U1.R13 | length 38.5
  Top Layer w0.127: RA18.6@23.1,23.8 24.013,23.8 v1(24.1,23.713) ; v1(27.1,24.413) 27.1,24.1 27.35,23.85 J9.1@28.05,23.85 ; v1(57.037,24.419) 57.037,23.609 U1.R13@57.43,23.216
  Bottom Layer w0.127: v1@24.1,23.7 26.4,23.7 27.1,24.4 30.9,24.4 31.276,24.024 35.723,24.024 36.299,24.6 43.367,24.6 43.943,24.024 51.991,24.024 52.113,24.146 52.359,24.146 52.416,24.202 53.302,24.202 54.394,25.294 56.162,25.294 v1(57.037,24.419)
NetJ9_2: J9.2 RA18.5 U1.T12 | length 37.7
  Top Layer w0.127: RA18.5@23.1,23 24.313,23 v1(24.4,22.913) ; v2@29.15,22.45 J9.2@29.15,23.85 ; v1@54.61,24.786 55.069,25.245 55.929,25.245 56.261,24.913 56.261,24.385 U1.T12@56.63,24.016
  Bottom Layer w0.127: v1@24.394,22.906 25.1,22.2 v2(29.1,22.2) 30.67,23.77 35.828,23.77 36.358,24.3 43.308,24.3 43.838,23.77 52.342,23.77 52.464,23.892 52.521,23.948 53.408,23.948 54.245,24.786 v1(54.534,24.786)
NetJ9_3: J9.3 R90.2 U1.P13 | length 42.7
  Top Layer w0.127: v2@30.2,22.3 30.25,22.35 J9.3@30.25,23.85 ; v1(40.4,16.513) 40.4,15.4 R90.2@40.6,15.2 ; U1.P13@58.23,23.216 58.53,23.516 59.182,23.516 59.316,23.65 59.316,24.265 v1(58.94,24.64)
  Bottom Layer w0.127: v2(30.2,22.2) 31.6,20.8 36.1,20.8 ; v1@40.4,16.5 36.1,20.8 ; v1(58.94,24.64) 58.34,24.64 57,23.3 55.914,23.3 55.058,22.444 53.883,22.444 53.573,22.134 46.942,22.134 46.708,21.9 45.4,21.9 44.956,22.344 37.644,22.344 36.1,20.8
NetJ9_5: J9.5 U1.T11 | length 29.9
  Top Layer w0.127: v2(32.4,22.2) 32.45,22.25 J9.5@32.45,23.85 32.5,23.9 v1@32.5,25.2 ; v1@54.164,26.864 54.494,26.864 55.366,25.993 56.07,25.993 56.262,25.801 56.262,25.338 56.63,24.97 U1.T11@56.63,24.816
  Bottom Layer w0.127: v1@32.5,25.2 32.5,25.6 33.146,26.246 48.148,26.246 48.802,25.592 52.445,25.592 52.677,25.824 53.015,26.161 53.164,26.31 53.722,26.31 v1@54.2,26.788
  other v1: 32.5,25.3 54.2,26.9
NetJ9_7: J9.7 RA18.8 U1.T10 | length 50.4
  Top Layer w0.127: RA18.8@23.1,25.4 24.8,25.4 28.8,21.4 33.9,21.4 34.65,22.15 J9.7@34.65,23.85 ; v1@54.991,27.453 55.072,27.453 55.677,26.848 55.977,26.848 56.261,26.564 56.261,26.264 56.63,25.895 U1.T10@56.63,25.616
  Bottom Layer w0.127: v2(24.3,25.4) 26.737,25.4 28.337,27 34.541,27 34.841,26.7 48.053,26.7 48.907,25.846 52.34,25.846 54.011,27.517 v1@54.927,27.517
  other v1: 55.1,27.5
NetJ9_8: J9.8 RA18.7 U1.P14 | length 51.2
  Top Layer w0.127: RA18.7@23.1,24.6 24.4,24.6 27.854,21.146 34.646,21.146 35.75,22.25 J9.8@35.75,23.85 36.8,24.9 36.8,27.254 37.6,28.054 v1@37.6,28.4 ; v1(54.173,28.398) 54.22,28.444 54.881,28.444 55.725,27.6 58.38,27.6 58.658,27.322 58.658,26.976 58.801,26.833 ; U1.P14@58.23,22.416 58.408,22.594 58.408,22.674 58.772,23.038 59.213,23.038 59.57,23.395 59.57,25.508 58.991,26.086 58.991,26.636 58.801,26.826
  Bottom Layer w0.127: v1@37.6,28.4 38.746,27.254 48.217,27.254 49.371,26.1 52.2,26.1 54.173,28.073 v1(54.173,28.398)
  other v1: 37.6,28.413
NetJ10_2: J10.2 RA15.2 | length 5.8
  Top Layer w0.127: J10.2@13.51,22.336 14.364,22.336 15.5,21.2 17.5,21.2 18,20.7 RA15.2@18.6,20.7
NetJ10_3: J10.3 RA15.1 | length 10.6
  Top Layer w0.127: J10.3@13.46,20.386 13.214,20.386 12.3,21.3 12.3,22.9 12.9,23.5 13.817,23.5 14.55,22.767 14.55,22.55 15.6,21.5 RA15.1@18.6,21.5
NetJ10_6: J10.6 RA15.4 | length 12.8
  Top Layer w0.127: J10.6@10.89,22.336 10.84,22.286 10.386,22.286 9.5,21.4 9.5,20 10.4,19.1 11.8,19.1 12,18.9 14.559,18.9 14.759,19.1 RA15.4@18.6,19.1
NetJ10_7: J10.7 RA15.3 | length 8.3
  Top Layer w0.127: J10.7@11.07,20.244 12.114,19.2 14.5,19.2 14.7,19.4 17.473,19.4 17.973,19.9 RA15.3@18.6,19.9
NetJ11_1: J11.1 RA20.7 U9.1 | length 11.2
  Top Layer w0.254: U9.1@43.147,24.257 43.901,24.257 45.658,22.5 45.658,21.169 44.958,20.469 44.958,19.742 46.4,18.3 ; RA20.7@45.1,17.6 45.7,17.6 46.4,18.3 ; J11.1@47.498,17.928 46.772,17.928 46.4,18.3
NetJ11_2: J11.2 U1.P12 | length 11.2
  Top Layer w0.127: v1@57.836,22.805 57.836,23.622 U1.P12@58.23,24.016
  Bottom Layer w0.127: J11.2@50.038,17.928 51.795,19.685 53.65,19.685 54.433,20.468 54.831,20.468 55.689,21.327 55.689,21.421 56.261,21.992 57.023,21.992 v1@57.836,22.805
  other v1: 57.836,22.818
NetJ12_1: J12.1 U1.J15 | length 28.2
  Top Layer w0.127: J12.1@50.77,2.57 51.07,2.57 v1(55.1,6.6) ; v1(62.2,8.2) 61.7,8.7 61.7,13.901 62.256,14.458 62.256,14.956 62.5,15.2 v1(62.5,18.2) ; U1.J15@62.23,21.616 v1(62.6,21.246)
  Bottom Layer w0.127: v1(55.1,6.6) 60.6,6.6 v1(62.2,8.2) ; v1(62.5,18.2) 62.5,18.516 62.1,18.916 62.1,20.746 v1(62.6,21.246)
NetJ12_2: J12.2 U1.U6 | length 39.4
  Top Layer w0.127: J12.2@48.31,2.59 48.31,2.29 49.1,1.5 51.529,1.5 56.5,6.471 56.5,13.8 57,14.3 57,16.8 54.538,19.262 54.172,19.262 52.37,21.063 52.37,23.022 52.128,23.263 52.128,25.46 51.5,26.089 51.5,27.1 52.696,28.296 53.443,28.296 54.091,28.944 55.275,28.944 55.404,28.816 U1.U6@55.83,28.816
NetJ12_3: J12.3 U1.U5 | length 41.3
  Top Layer w0.127: J12.3@45.7,2.5 46.4,2.5 47.71,3.81 49.5,3.81 49.89,4.2 51.5,4.2 56.208,8.908 56.208,14.308 56.5,14.6 56.5,16.9 56.2,17.2 55.76,17.2 52.116,20.844 52.116,22.917 51.874,23.158 51.874,25.355 50.156,27.074 50.156,27.484 50.745,28.074 51.615,28.074 52.56,29.019 53.448,29.019 54.045,29.616 U1.U5@55.83,29.616
NetJ12_4: J12.4 U1.H17 | length 38.3
  Top Layer w0.127: U1.H17@63.03,20.016 63.03,19.6 63.1,19.53 63.1,17.8 62.9,17.6 62.9,14.742 62,13.842 62,9.4 63.85,7.55 v2@63.85,4.35
  Bottom Layer w0.127: J12.4@43.18,2.54 44.14,3.5 63,3.5 v2@63.85,4.35
  other v2: 63.8,4.4
NetJ12_5: J12.5 U1.K15 | length 42.6
  Top Layer w0.127: J12.5@40.64,2.54 40.64,1.774 41.716,0.699 42.339,0.699 42.595,0.954 60.354,0.954 61.143,1.743 61.143,14.062 61.748,14.668 61.748,15.167 61.992,15.41 61.992,17.72 61.801,17.911 61.801,18.489 61.808,18.496 61.808,19.556 61.753,19.612 61.8,19.659 61.8,21.246 U1.K15@61.43,21.616
NetJ12_6: J12.6 U1.J17 | length 45.9
  Top Layer w0.127: J12.6@38.1,2.54 39.94,0.7 41.3,0.7 41.555,0.445 42.445,0.445 42.7,0.7 61.726,0.7 63.3,2.274 63.3,3.3 61.4,5.2 61.4,13.96 62.002,14.563 62.002,15.062 62.246,15.305 62.246,17.825 62.055,18.016 62.055,18.384 62.062,18.391 62.062,19.562 62.23,19.73 U1.J17@62.23,20.016
NetQ1_2: Q1.1 R88.2 | length 2.7
  Top Layer w0.127: R88.2@112.384,27.432 112.384,28.056 Q1.1@113.858,29.53
NetQ1_3: Q1.3 R87.2 | length 3
  Top Layer w0.254: R87.2@113.485,33.845 114.808,32.522 Q1.3@114.808,31.43
NetR53_1: R53.1 U2.10 | length 3.9
  Top Layer w0.254: U2.10@29.23,39.156 29.23,37.07 R53.1@30.5,35.8
NetR58_2: R58.2 U1.B3 U4.19 U5.19 | length 79.7
  Top Layer w0.127: U1.B3@67.83,31.216 68.228,31.614 v1@68.228,31.603 ; v1(70.231,30.353) 70.231,28.956 70.866,28.321 70.866,26.946 71.12,26.692 71.12,23.108 70.993,22.981 v1(70.993,22.352) ; R58.2@79,19.198 80.01,20.208 v2(80.01,20.828)
  Top Layer w0.254: v2(85.725,39.243) 86.487,38.481 v2(86.487,36.322) ; v2(93.091,38.608) U5.19@93.091,40.131 ; U4.19@99.886,21.292 99.949,21.229 v2(99.949,19.812)
  Bottom Layer w0.127: v1@68.23,31.616 68.228,31.614 68.228,31.603 68.56,31.603 69.19,32.233 69.5,32.233 69.787,31.946 69.787,30.797 v1(70.231,30.353) ; v1(70.993,22.352) 71.31,22.034 73.596,22.034 74.759,20.872 79.966,20.872 v2(80.01,20.828) ; 91.327,26.868 91.327,24.564 93.08,22.811 93.08,22.721 93.21,22.591 93.21,21.603 92.456,20.849
  Bottom Layer w0.254: v2(80.01,20.828) 80.92,21.738 89.039,21.738 89.928,20.849 92.456,20.849 92.456,19.63 92.821,19.265 99.402,19.265 v2(99.949,19.812) ; v2(85.725,39.243) 86.042,39.56 91.94,39.56 92.765,38.735 92.964,38.735 93.091,38.862 v2(93.091,38.608) ; v2(86.487,36.322) 86.995,35.814 86.995,32.893 90.361,29.527 90.361,27.834 91.327,26.868
  other v1: 68.228,31.623
NetR68_2: R68.2 U1.F14 | length 9.6
  Top Layer w0.127: U1.F14@64.63,22.416 v1(65.03,22.016) ; v2@72.009,20.712 R68.2@73.406,20.712
  Bottom Layer w0.127: v1(65.03,22.016) 65.03,21.77 65.139,21.661 66.034,21.661 66.719,20.976 69.088,20.976 69.363,20.701 v2(72.009,20.701)
NetR77_2: R77.2 U1.F15 | length 6.6
  Top Layer w0.127: R77.2@64.5,16.9 65.393,16.9 66.196,17.703 v1(66.196,19.148) ; U1.F15@64.63,21.616 v1(65.03,21.216)
  Bottom Layer w0.127: v1(65.03,21.216) 65.03,20.314 v1(66.196,19.148)
NetR88_1: R88.1 U1.B14 | length 63.2
  Top Layer w0.127: U1.B14@67.83,22.416 68.254,21.992 70.231,21.992 v2(70.358,21.865) ; v2(80.899,19.833) 83.566,17.166 v2(83.566,16.531) ; R88.1@114.184,27.432 115.128,27.432 116.511,26.049 116.511,24.725 117.11,24.125 117.435,24.125 117.983,23.577 v2(117.983,23.135)
  Bottom Layer w0.127: v2(70.358,21.865) 70.443,21.78 72.456,21.78 74.508,19.729 80.794,19.729 v2(80.899,19.833) ; v2(83.566,16.531) 83.931,16.896 86.207,16.896 86.508,16.595 90.134,16.595 90.345,16.383 103.034,16.383 103.245,16.595 105.956,16.595 107.035,17.674 113.196,17.674 117.475,21.953 117.475,22.246 117.983,22.754 v2(117.983,23.135)
NetRA3_1: RA3.1 U1.D4 | length 24.3
  Top Layer w0.127: RA3.1@48.298,37.408 50.498,37.408 51.054,36.852 51.054,36.449 52.006,35.496 52.617,35.496 52.744,35.623 53.428,35.623 53.975,35.076 53.975,31.975 v1@53.937,31.938 ; v1(60.579,28.956) 62.744,28.956 62.808,28.892 63.176,28.892 63.494,29.21 65.024,29.21 U1.D4@66.23,30.416
  Bottom Layer w0.127: v1(53.975,31.9) 54.35,31.9 56.384,29.866 58.057,29.866 58.702,29.221 58.761,29.28 59.372,29.28 59.696,28.956 v1(60.579,28.956)
NetRA3_2: RA3.2 U1.C2 | length 26
  Top Layer w0.127: RA3.2@48.298,38.208 50.057,38.208 51.604,36.661 51.645,36.703 v1(51.689,36.703) v1@51.816,36.703 ; v1(62.738,37.592) 62.992,37.338 64.109,37.338 65.951,35.496 66.81,35.496 68.138,34.169 68.138,33.721 67.428,33.011 67.428,32.414 U1.C2@67.03,32.016
  Bottom Layer w0.127: v1(51.689,36.703) 51.816,36.703 51.816,37.235 52.935,38.354 62.043,38.354 62.738,37.659 v1(62.738,37.592)
NetRA3_3: RA3.3 U1.D2 | length 28.6
  Top Layer w0.127: RA3.3@48.298,39.008 50.086,39.008 52.222,36.871 52.222,36.535 52.197,36.509 v1(52.197,36.068) ; v1(61.722,37.719) 62.075,37.719 62.293,37.5 62.293,37.408 62.554,37.148 62.646,37.148 62.674,37.119 62.674,37.081 62.697,37.059 64.03,37.059 65.846,35.242 66.705,35.242 67.818,34.13 67.818,33.76 67.372,33.314 67.143,33.314 66.929,33.528 ; v1@65.786,32.385 66.155,32.016 U1.D2@66.23,32.016 ; v1(66.675,33.528) 66.929,33.528 ; 66.954,33.553 66.929,33.528
  Bottom Layer w0.127: v1(52.197,36.068) 52.133,36.131 52.324,36.322 52.324,37.384 53.04,38.1 61.341,38.1 v1(61.722,37.719) ; v1@65.786,32.385 66.675,33.274 v1(66.675,33.528) ; v1@66.754,33.528 66.73,33.504 v1@66.778,33.504
  other v1: 65.83,32.416
NetRA3_4: RA3.4 U1.E3 | length 25
  Top Layer w0.127: RA3.4@48.298,39.808 49.727,39.808 52.642,36.893 52.642,36.72 53.421,35.941 v1(55.118,35.941) ; v1@60.528,35.916 60.874,36.262 61.347,36.262 61.566,36.043 63.609,36.043 65.405,34.246 65.405,33.932 65.659,33.678 65.659,33.528 v1(65.532,33.528) ; U1.E3@65.43,31.216 v1(65.83,31.616)
  Bottom Layer w0.127: v1(55.118,35.941) 55.353,35.706 57.042,35.706 57.468,36.131 60.312,36.131 v1@60.528,35.916 ; v1(65.532,33.528) 65.278,33.528 64.579,32.829 64.579,32.232 65.195,31.616 v1(65.83,31.616)
  other v1: 60.503,36.068
NetRA4_1: RA4.1 U1.E4 | length 41.5
  Top Layer w0.127: RA4.1@48.298,41.472 49.092,41.472 49.276,41.656 49.911,41.656 50.292,41.275 50.292,39.624 52.959,36.957 v2(53.213,36.957) ; v1(49.784,29.739) 49.89,29.739 49.634,29.995 46.603,29.995 45.974,30.624 45.974,32.131 46.355,32.512 49.784,32.512 v2(50.038,32.766) ; v1@65.024,29.845 65.024,30.01 U1.E4@65.43,30.416
  Bottom Layer w0.127: v1(49.784,29.739) 49.932,29.739 49.993,29.678 50.096,29.781 53.492,29.781 53.568,29.858 54.778,29.858 54.855,29.781 55.75,29.781 56.174,29.358 57.847,29.358 58.609,28.596 58.796,28.596 58.972,28.772 59.162,28.772 59.879,28.055 60.796,28.055 61.468,28.727 63.144,28.727 63.817,29.4 64.415,29.4 64.859,29.845 v1(64.897,29.845) v1@65.024,29.845 ; v2(50.038,32.766) 50.165,32.893 50.465,32.893 50.99,33.418 50.99,33.638 51.308,33.955 51.308,34.417 53.213,36.322 v2(53.213,36.957)